# Altium PCB PCB1.PcbDoc
Units mm, origin at the board's own origin, x right, y up, seen from the top; angles counter-clockwise.
Board outline 58.42 x 51.94 mm, 2 copper layers (Top Layer, Bottom Layer); 14 components, 8 nets, 34 pads, 0 vias.
Unrouted connection lines stored in the file: 1.
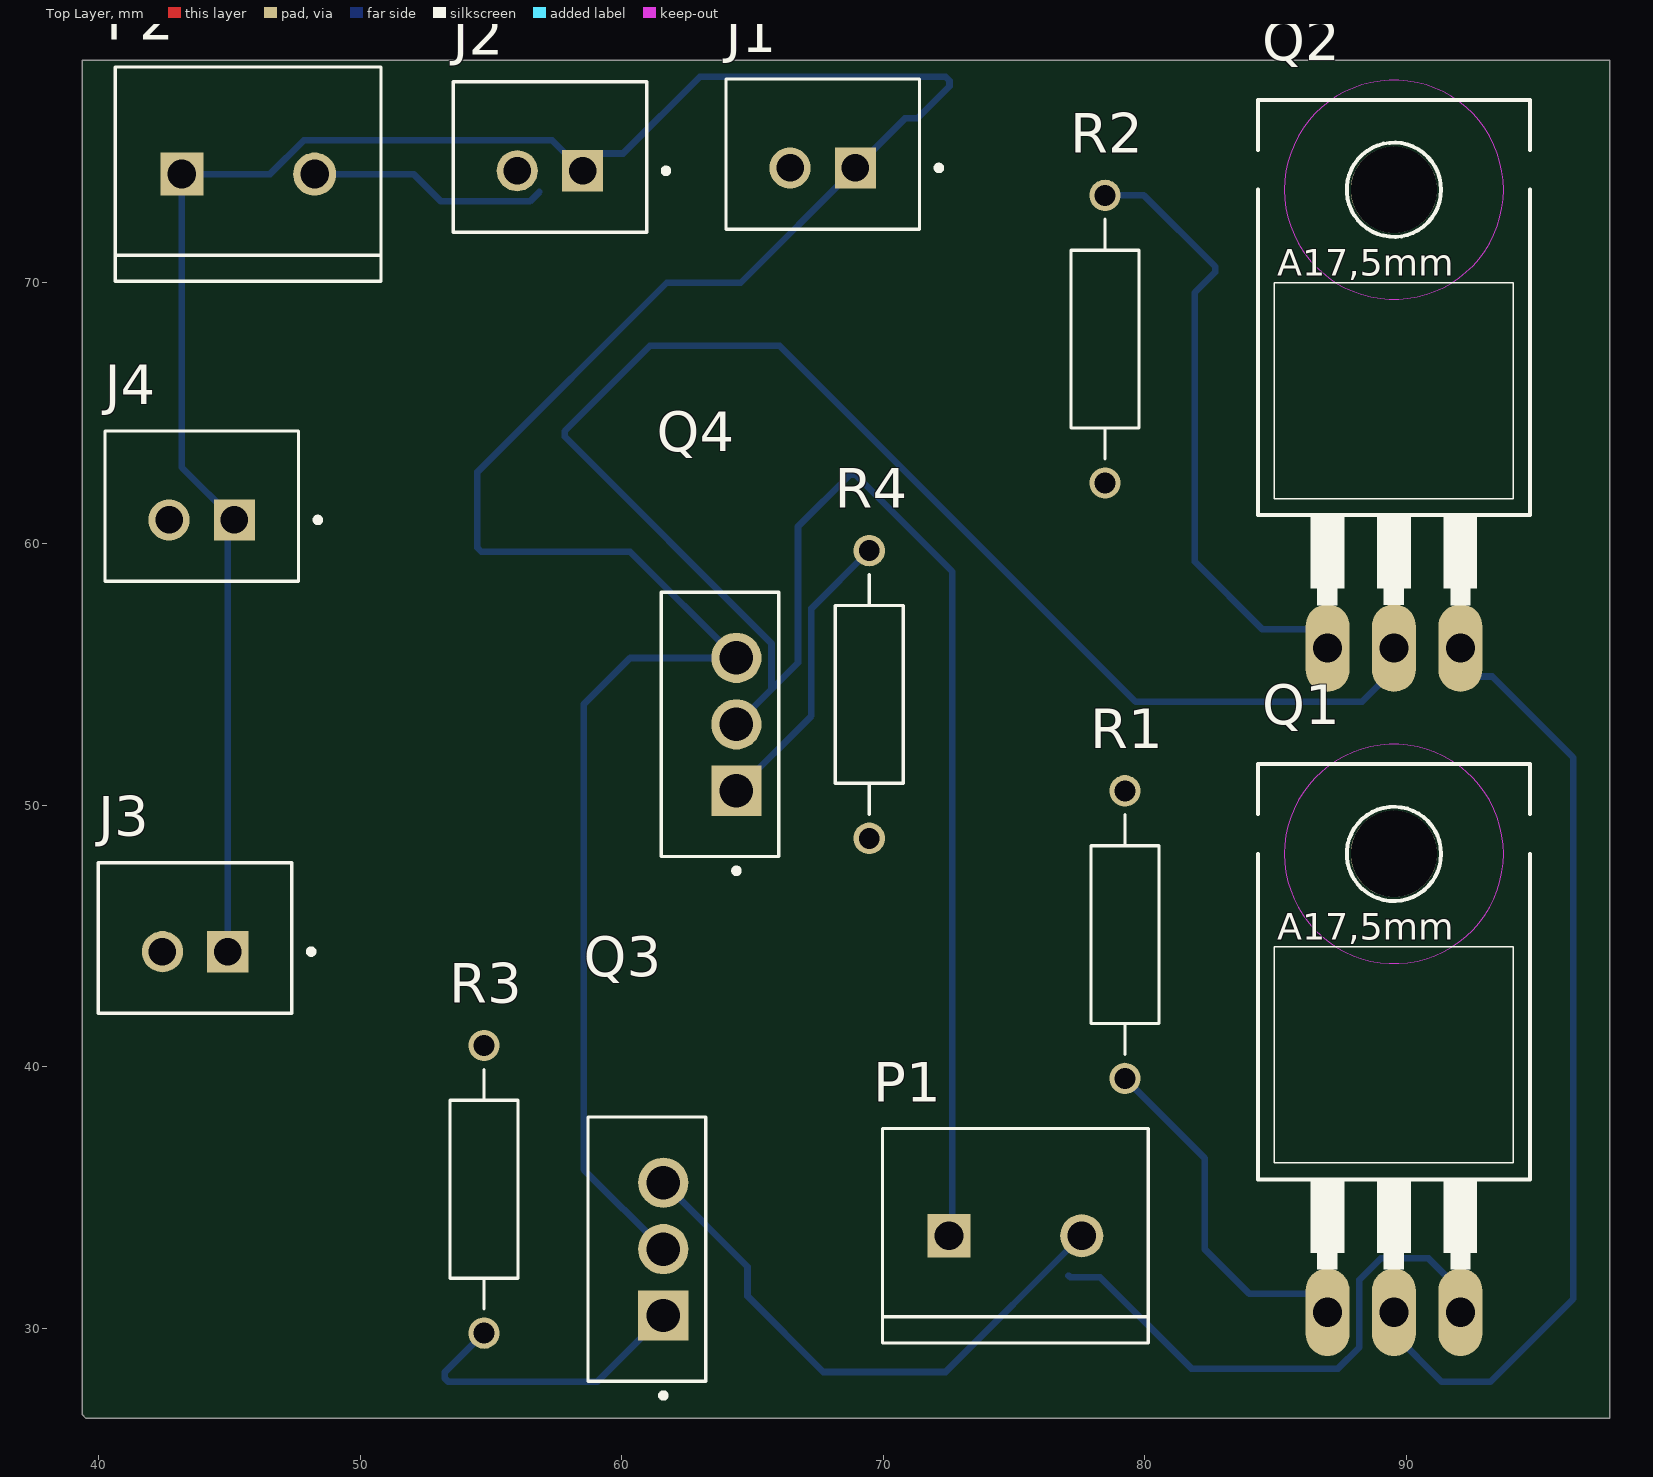
[diagram p0: Top Layer view]
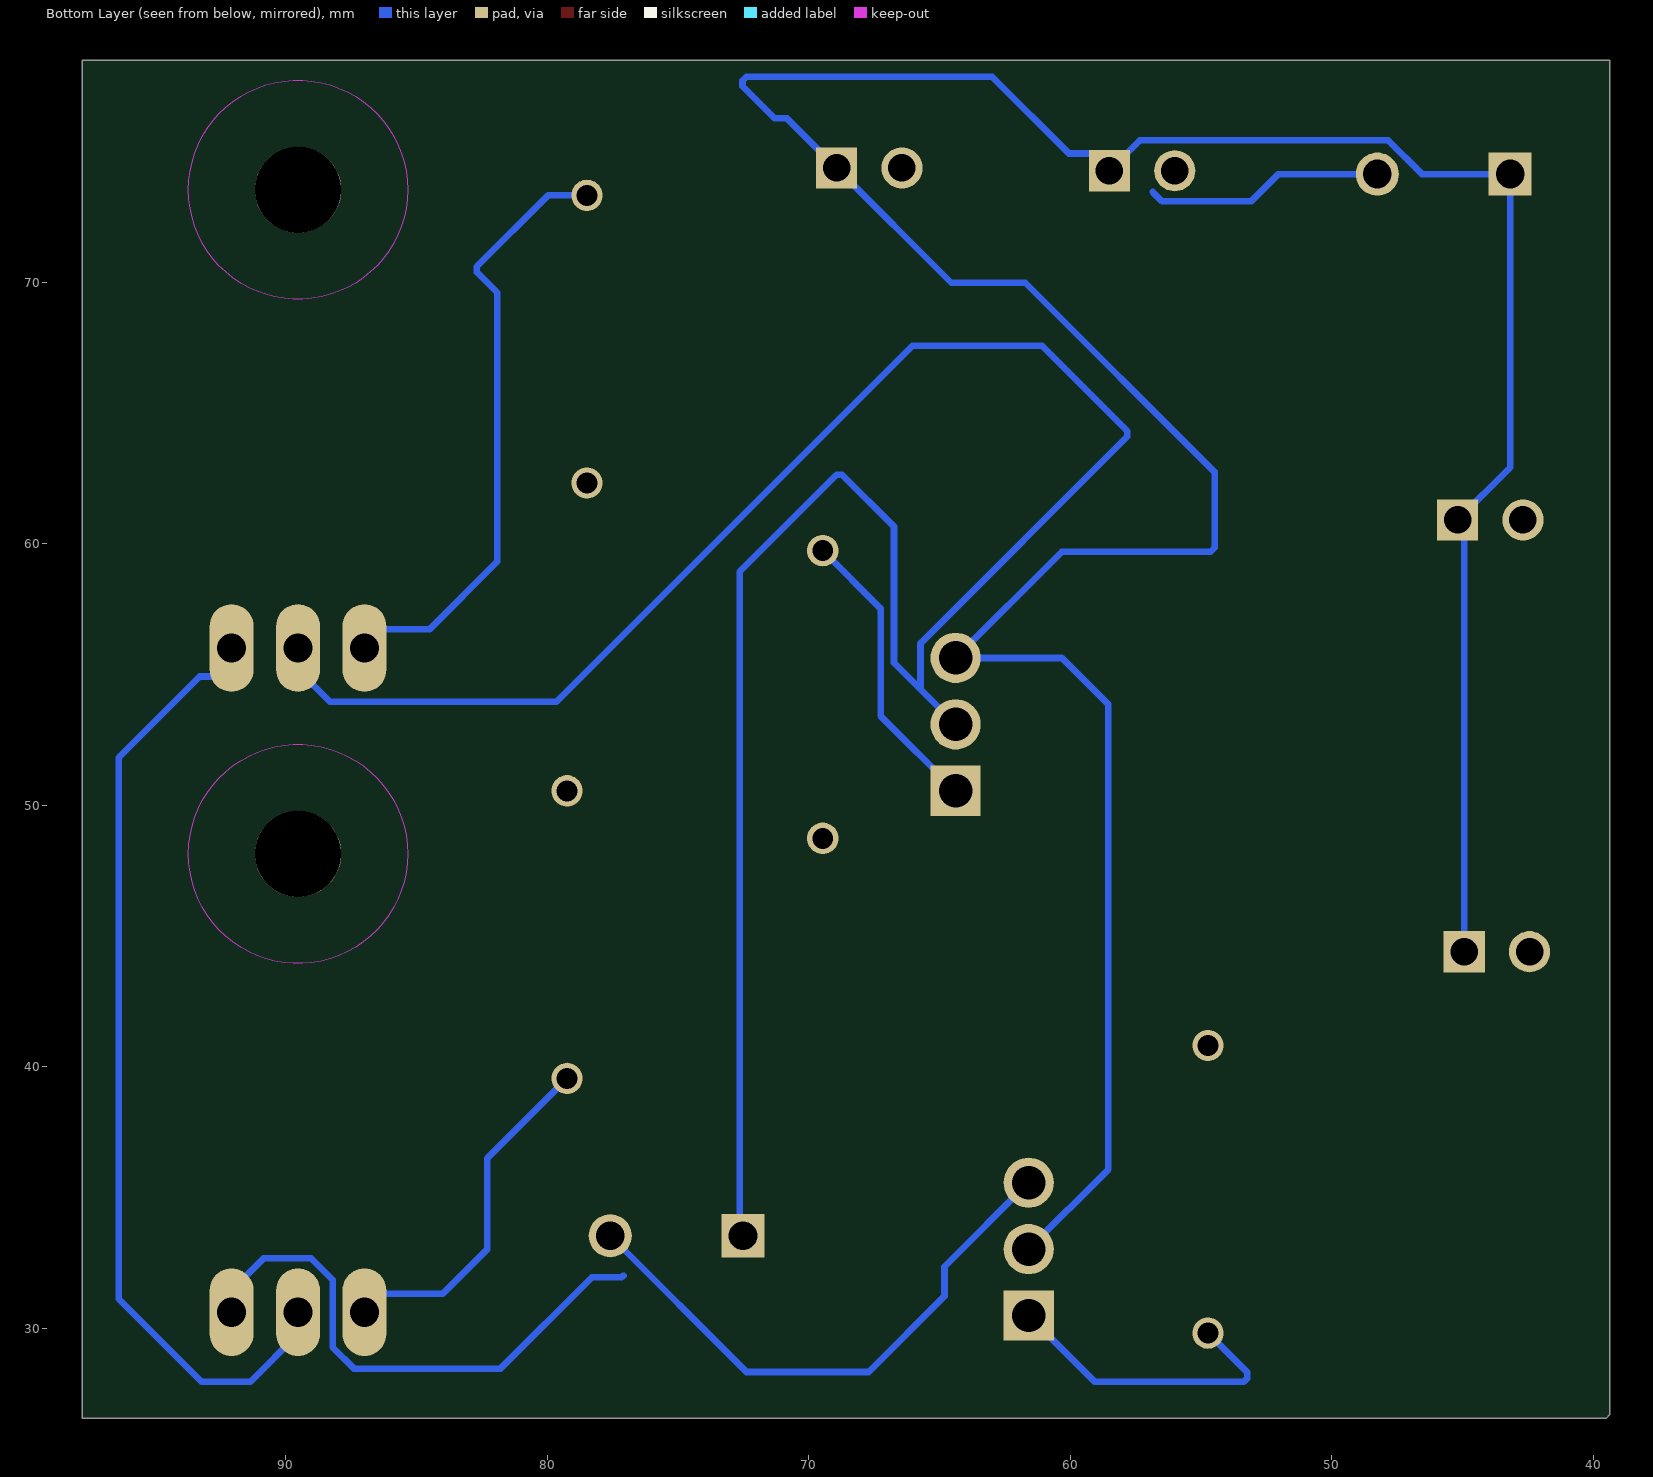
[diagram p1: Bottom Layer view, seen from below]
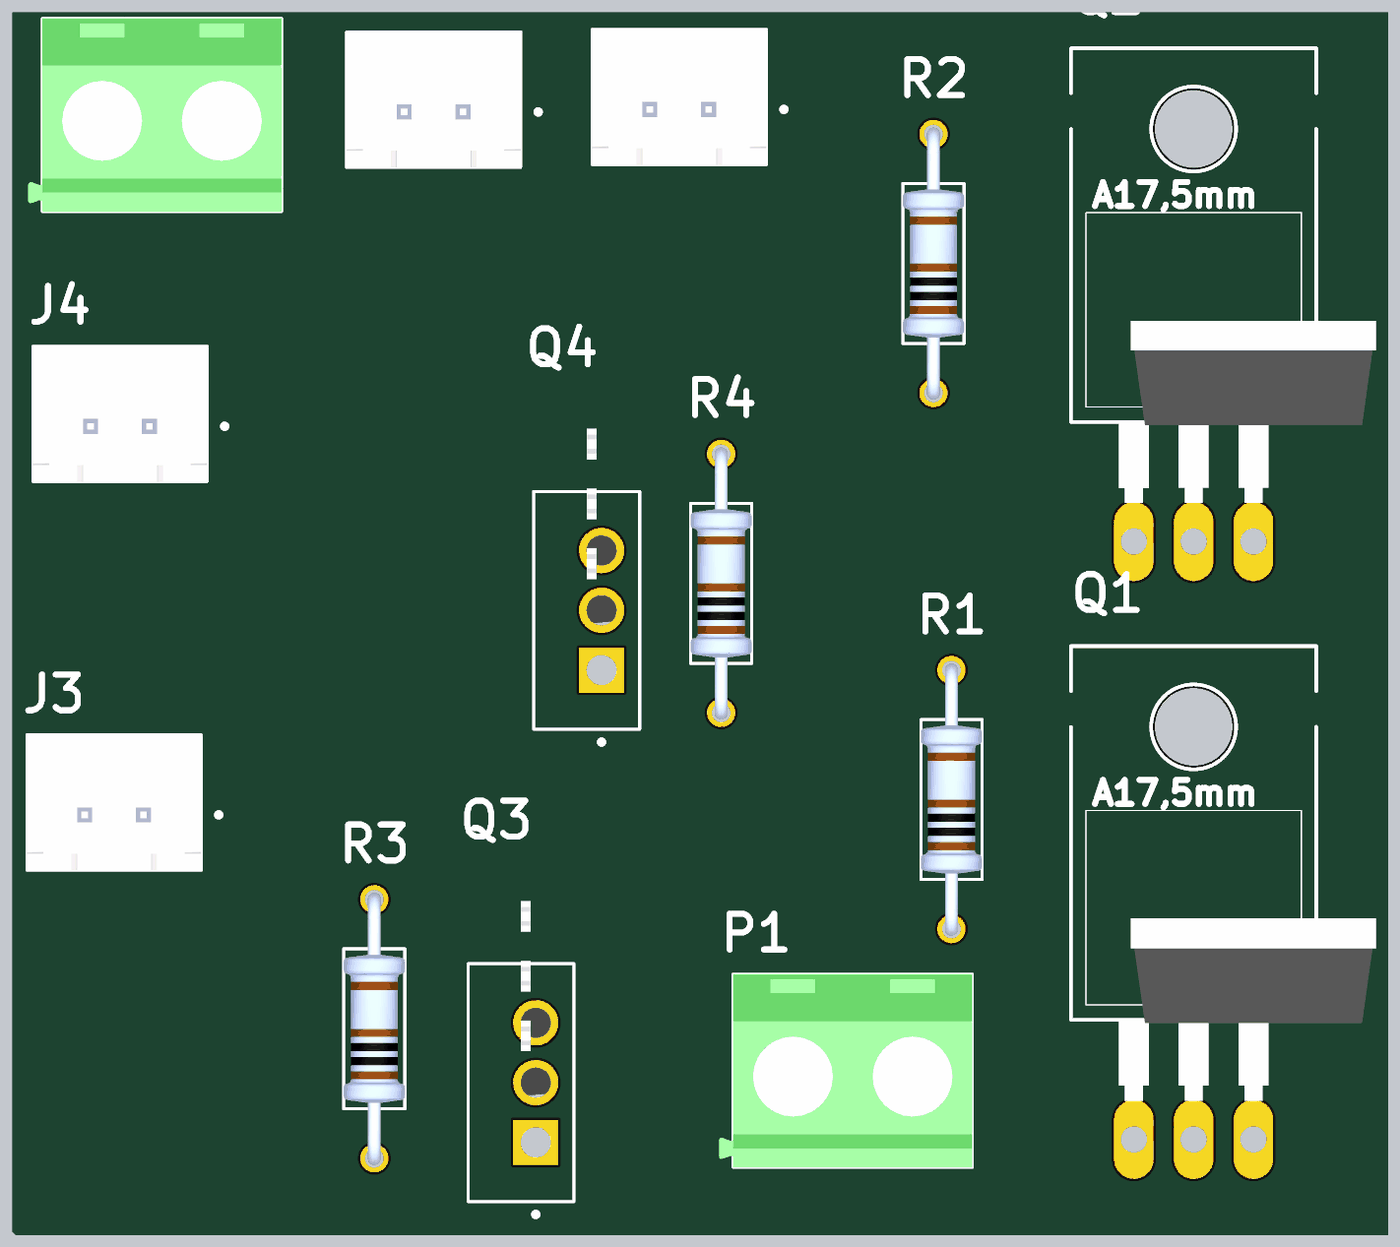
[diagram p2: 3D render of the assembled board from above, using the file's embedded part models]

## Layer stack, top to bottom
Top Solder: solder mask 0.0102, Solder Resist, Dk 3.5
Top Layer: signal copper 0.0356
Dielectric 1: dielectric 0.32, FR-4, Dk 4.8
Bottom Layer: signal copper 0.0356
Bottom Solder: solder mask 0.0102, Solder Resist, Dk 3.5

## Board outline
39.37,26.692 39.519,26.543 97.79,26.543 97.79,78.486 39.37,78.486

## Design rules (kind name [scope] priority, off if disabled: settings)
Clearance [All] p1: gap=0.254 ignorepadtopadclearanceinfootprint=FALSE except(0: Arc-Hole Track-Hole SMDPad-Hole THPad-Hole Via-Hole Fill-Hole Poly-Hole Region-Hole Text-Hole)
PolygonConnect [All] p1: connectstyle=Relief reliefconductorwidth=0.254 reliefentries=4 polygonreliefangle="90 Angle" airgapwidth=0.254
RoomDefinition Sheet1 [InComponentClass('Sheet1')] p1: confinementstyle=ConfineIn formatcopy=TRUE lockcomponents=FALSE outline 39.878,26.758 97.917,26.758 97.917,78.955 39.878,78.955
RoutingVias [All] p1: holewidth=0.711 width=1.27 viastyle="Through Hole" minholewidth=0.711 minwidth=1.27 maxholewidth=0.711 maxwidth=1.27
SolderMaskExpansion [All] p1: expansion=0.102 istentingtop=FALSE
Width [All] p1: maxlimit=0.254 minlimit=0.254 preferedwidth=0.254
30 further rules are at their usual default settings.

## Components (designator, comment, footprint, x,y, rotation, side; value= is the part's Value field where it differs from the comment)
J1 "B2B-XH-A(LF)(SN)" JST_B2B-XH-A(LF)(SN) 67.691,74.891 r0 top
J2 "B2B-XH-A(LF)(SN)" JST_B2B-XH-A(LF)(SN) 57.257,74.781 r0 top
J3 "B2B-XH-A(LF)(SN)" JST_B2B-XH-A(LF)(SN) 43.688,44.919 r0 top
J4 "B2B-XH-A(LF)(SN)" JST_B2B-XH-A(LF)(SN) 43.942,61.429 r0 top
P1 "282837-2" TE_282837-2 75.057,33.528 r0 top
P2 "282837-2" TE_282837-2 45.72,74.129 r0 top
Q1 "IRF4905PBF" TO220BH 89.535,36.957 r0 top
Q2 "IRF4905PBF" TO220BH 89.535,62.357 r0 top
Q3 "DIT050N06" TO254P1010X450X1980-3B 60.965,33.02 r90 top
Q4 "DIT050N06" TO254P1010X450X1980-3B 63.759,53.086 r90 top
R1 "MFR-25FBF52-10K" RESAD1100W55L680D260 79.248,45.046 r90 top
R2 "MFR-25FBF52-10K" RESAD1100W55L680D260 78.486,67.818 r90 top
R3 "MFR-25FBF52-10K" RESAD1100W55L680D260 54.737,35.306 r90 top
R4 "MFR-25FBF52-10K" RESAD1100W55L680D260 69.469,54.229 r90 top

## Footprints (in the part's own frame and the unit in brackets; to place one, negate y for a bottom-side part, rotate by r counter-clockwise, add the part's x,y. Pads: shape width x height; smd on the part's side, far side on the other; paste and mask are expansions set on the pad)
JST_B2B-XH-A(LF)(SN) [mm]
  rect 1.575x1.575 / inner round 1.575 / far side rect 1.575x1.575 hole 1.05: 1(1.25,-0.525)
  round 1.575 hole 1.05: 2(-1.25,-0.525)
  silkscreen extent -3.7,-2.88 4.54,2.88, body extent -3.7,-2.88 3.7,2.88, height 7
RESAD1100W55L680D260 [mm]
  round 1.2 hole 0.8: 1(-5.5,0) 2(5.5,0)
  silkscreen extent -4.58,-1.3 4.58,1.3, body extent -5.77,-1.3 5.77,1.3, height 2.6
TE_282837-2 [mm]
  rect 1.65x1.65 / inner round 1.65 / far side rect 1.65x1.65 hole 1.1: 1(-2.54,0)
  round 1.65 hole 1.1: 2(2.54,0)
  silkscreen extent -5.08,-4.1 5.08,4.1, body extent -5.68,-4.1 5.08,4.1, height 10
TO220BH [mil]
  oval 66x132 hole 44: D(0,-250) G(-100,-250) S(100,-250)
  round 130 hole 130 unplated: ""(0,440)
  Keep-Out Layer circle w0: c0,440 r165
  Keep-Out Layer circle w0: c0,440 r165
  silkscreen extent -205,-186 205,575, body extent -105,-56 305,120, height 760
TO254P1010X450X1980-3B [mm]
  rect 1.92x1.92 / inner round 1.92 / far side rect 1.92x1.92 hole 1.28: 1(-2.54,-0.63)
  round 1.92 hole 1.28: 2(0,-0.63) 3(2.54,-0.63)
  silkscreen extent -5.7,-2.25 5.05,2.25, body extent -0.64,-1.83 9.67,2.67, height 10.1

## Part data
J1 J2 J3 J4: "Connector Header Through Hole 2 position 0.098 (2.50mm)", Package=None, Check_prices=https://www.snapeda.com/parts/B2B-XH-A(LF)(SN)/JST+Sales+America+Inc./view-part/?ref=eda, MF="JST Sales America Inc.", MP=B2B-XH-A(LF)(SN), SnapEDA_Link=https://www.snapeda.com/parts/B2B-XH-A(LF)(SN)/JST+Sales+America+Inc./view-part/?ref=snap
P1 P2 Q3 Q4: Package=None, Price=None
  P1 P2: Availability="In Stock", Check_prices=https://www.snapeda.com/parts/282837-2/TE+Connectivity+AMP+Connectors/view-part/?ref=eda, MF="TE Connectivity", MP=282837-2, Purchase-URL=https://pricing.snapeda.com/search/part/282837-2/?ref=eda, SnapEDA_Link=https://www.snapeda.com/parts/282837-2/TE+Connectivity+AMP+Connectors/view-part/?ref=snap
  Q3 Q4: Availability=Unavailable, MP=DIT050N06
Q1 Q2: "P-Channel 55 V 74A (Tc) 200W (Tc) Through Hole TO-220AB", Package="TO-220 Infineon", Availability="In Stock", Check_prices=https://www.snapeda.com/parts/IRF4905PBF/Infineon+Technologies/view-part/?ref=eda, MF=Infineon, MP=IRF4905PBF, Price=None, Purchase-URL=https://pricing.snapeda.com/search/part/IRF4905PBF/?ref=eda, SnapEDA_Link=https://www.snapeda.com/parts/IRF4905PBF/Infineon+Technologies/view-part/?ref=snap
R1 R2 R3 R4: "10.2 kOhms Â±1% 0.25W, 1/4W Through Hole Resistor Axial - Metal Film", Package="Axial Yageo", Availability="In Stock", Check_prices=https://www.snapeda.com/parts/MFR-25FBF52-10K/Yageo/view-part/?ref=eda, MF=Yageo, MP=MFR-25FBF52-10K, Price=None, Purchase-URL=https://pricing.snapeda.com/search/part/MFR-25FBF52-10K/?ref=eda, SnapEDA_Link=https://www.snapeda.com/parts/MFR-25FBF52-10K/Yageo/view-part/?ref=snap

## Nets (pads, with @x,y where several pads share a name; then routed paths per layer and width w, separated by ;. In a path a pad name is that pad's centre, name@x,y a point inside that pad or via, vN(x,y) a via of type N, cw(c..) or ccw(c..) an arc to the next point about the centre after c; other vN are vias at no path point)
GND: J1.1 J2.1 J3.1 J4.1 P2.1 Q3.2 Q4.3 | length 130.2
  Bottom Layer w0.254: J3.1 44.938,60.65 J4.1 43.18,62.916 P2.1 46.554,74.129 47.85,75.425 57.338,75.425 J2.1 59.168,74.917 60.058,74.917 62.992,77.851 72.39,77.851 72.539,77.702 72.539,77.492 71.306,76.259 70.834,76.259 J1.1 64.552,69.977 61.722,69.977 54.483,62.738 54.483,59.839 54.632,59.69 60.325,59.69 Q4.3 60.325,55.626 58.547,53.848 58.547,36.068 Q3.2
NetP1_1: P1.1 Q2.D Q4.2 | length 95.4
  Bottom Layer w0.254: Q4.2 65.73,54.427 ; P1.1 72.644,33.655 72.644,58.928 68.939,62.633 68.729,62.633 66.747,60.651 66.747,55.444 65.73,54.427 ; Q2.D 89.535,55.169 88.316,53.95 79.654,53.95 66.04,67.564 61.087,67.564 57.822,64.299 57.822,64.089 65.73,56.181 65.73,54.427
NetP1_2: P1.2 Q1.S Q3.3 | length 42.9
  Bottom Layer w0.254: Q3.3 64.813,32.342 64.813,31.221 67.713,28.321 72.39,28.321 P1.2 ; 77.089,32.004 77.152,31.941 78.295,31.941 81.788,28.448 87.398,28.448 88.214,29.264 88.214,31.849 89.03,32.664 90.856,32.664 92.075,31.445 Q1.S
NetQ1_D: Q1.D Q2.S | length 36.8
  Bottom Layer w0.254: Q1.D 89.535,29.769 91.364,27.94 93.218,27.94 96.393,31.115 96.393,51.816 93.294,54.915 92.732,54.915 92.075,55.572 Q2.S
NetQ1_G: Q1.G R1.1 | length 13.5
  Bottom Layer w0.254: R1.1 82.296,36.498 82.296,33.02 83.998,31.318 86.338,31.318 86.995,30.661 Q1.G
NetQ2_G: Q2.G R2.2 | length 23.4
  Bottom Layer w0.254: R2.2 79.971,73.318 82.699,70.59 82.699,70.38 81.915,69.596 81.915,59.309 84.506,56.718 86.338,56.718 86.995,56.061 Q2.G
NetQ3_1: Q3.1 R3.1 | length 11.8
  Bottom Layer w0.254: R3.1 53.23,28.299 53.23,28.089 53.379,27.94 59.055,27.94 Q3.1
NetQ4_1: Q4.1 R4.2 | length 11.3
  Bottom Layer w0.254: Q4.1 67.255,53.412 67.255,57.515 R4.2
pads on no net: J1.2 J2.2 J3.2 J4.2 P2.2 Q1. Q2. R1.2 R2.1 R3.2 R4.1
copper on no net: | length 9.3
  Bottom Layer w0.254: 48.26,74.129 52.044,74.129 53.085,73.087 56.491,73.087 56.853,73.449 ; 79.248,50.546 79.375,50.546

## Text inside footprints (layer, text, board x,y; h text height)
Q1: Top Overlay "A17,5mm" at 85.079,44.851 h1.02
Q2: Top Overlay "A17,5mm" at 85.079,70.251 h1.02